# EAGLE board LED card (EAGLE 6.2)
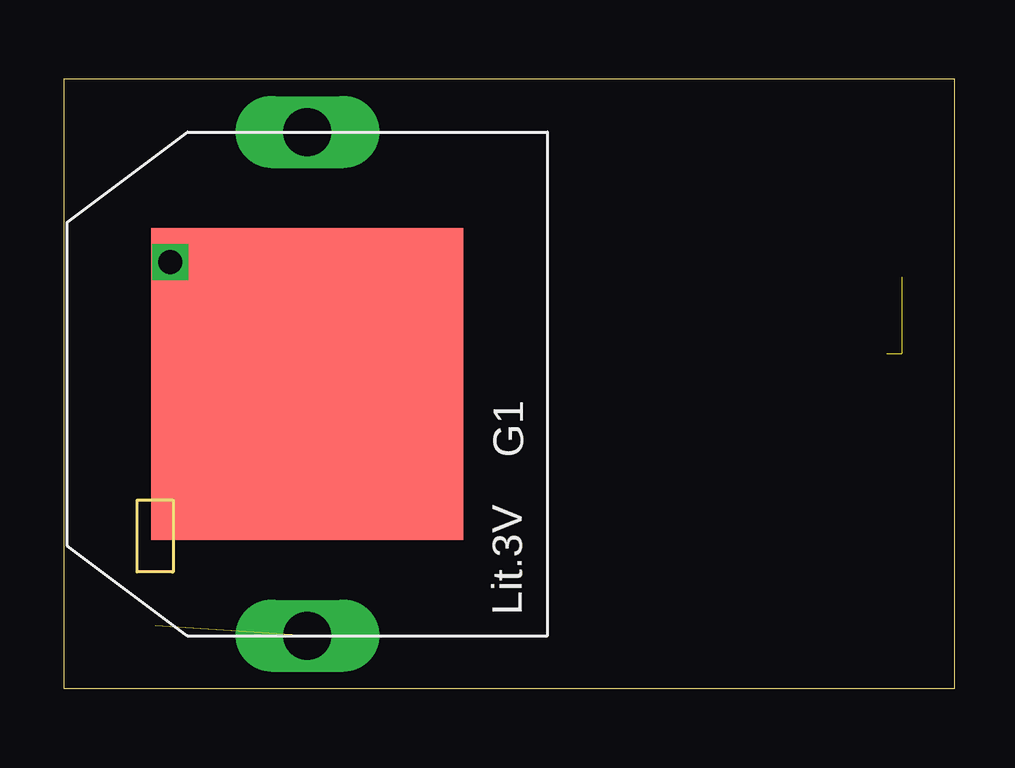
[diagram p0: board, top side]
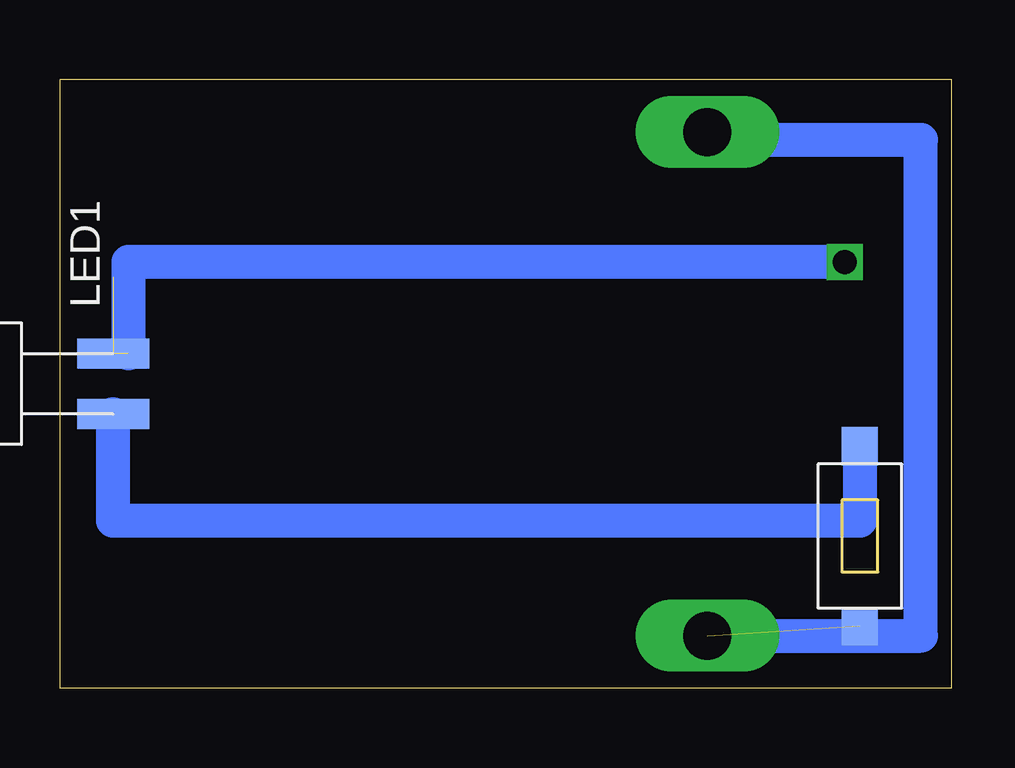
[diagram p1: board, bottom side, seen from below]

Size 37.13 x 25.39 mm. Coordinates in mm from the lower left corner, seen from the top.
Outline: 0,0 37.13,0 37.13,25.39 0,25.39 0,0
Copper layers (1*16): Top 0.035mm / dielectric 1.5mm / Bottom 0.035mm
Design rules: minimum track width 10mil, minimum drill 24mil, track to track 8mil, track to pad 8mil, pad to pad 8mil, via to via 8mil, smd to smd 8mil, copper to edge 40mil, drill to drill 8mil, minimum pad ring 10mil, minimum via ring 8mil, stop-mask expansion 4mil, vias tented up to drill 0mil, thermal gap 10mil

## Footprints (pad centres in the part's own frame; a part is rotated, then mirrored left to right if it is on the bottom)
CR2032H = drill 2 long: + -10.5,0; +@1 10.5,0 | smd 13 x 13: - 0,0
LED5MM = smd 1.25 x 3: A -1.27,0; K 1.27,0
TS-03M-LF-T = smd 1.5 x 1.6: P$1 0,3.75; P$2 0,-3.75

## Placement (x,y rotation side)
G1  CR2032H  [CR2032H]  10.16,12.7 90 top
LED1  [LED5MM]  34.92,12.7 90 bottom
U$1  TS-03M-LF-T  [TS-03M-LF-T]  3.81,6.35 180 bottom

## Library data of the parts
G1 LED1 U$1 = RobThePyro

## Nets
N$1: G1.+ G1.+@1 U$1.P$1
N$2: LED1.A U$1.P$2
N$3: G1.- LED1.K

## Tracks (layer width: path | path; a pad name or v marks a point on that pad's centre or on a via)
N$1  (1 unrouted)
  Bottom 1.422: G1.+ 1.27,2.2 1.27,22.86 10.16,22.86 G1.+@1
N$2
  Bottom 1.422: U$1.P$2 3.81,6.99 34.92,6.99 LED1.A
N$3  (via drill 1)  (2 unrouted)
  Top 1.422: G1.- 4.45,12.7 v4.45,17.78 12.7,12.7 G1.-
  Bottom 1.422: v4.45,17.78 34.29,17.78 34.29,13.97
N$4  (via drill 1)
  other vias: 4.45,17.78